# EAGLE board RTC-Module-Panel-v13 (EAGLE 5.06), part 1 of 2
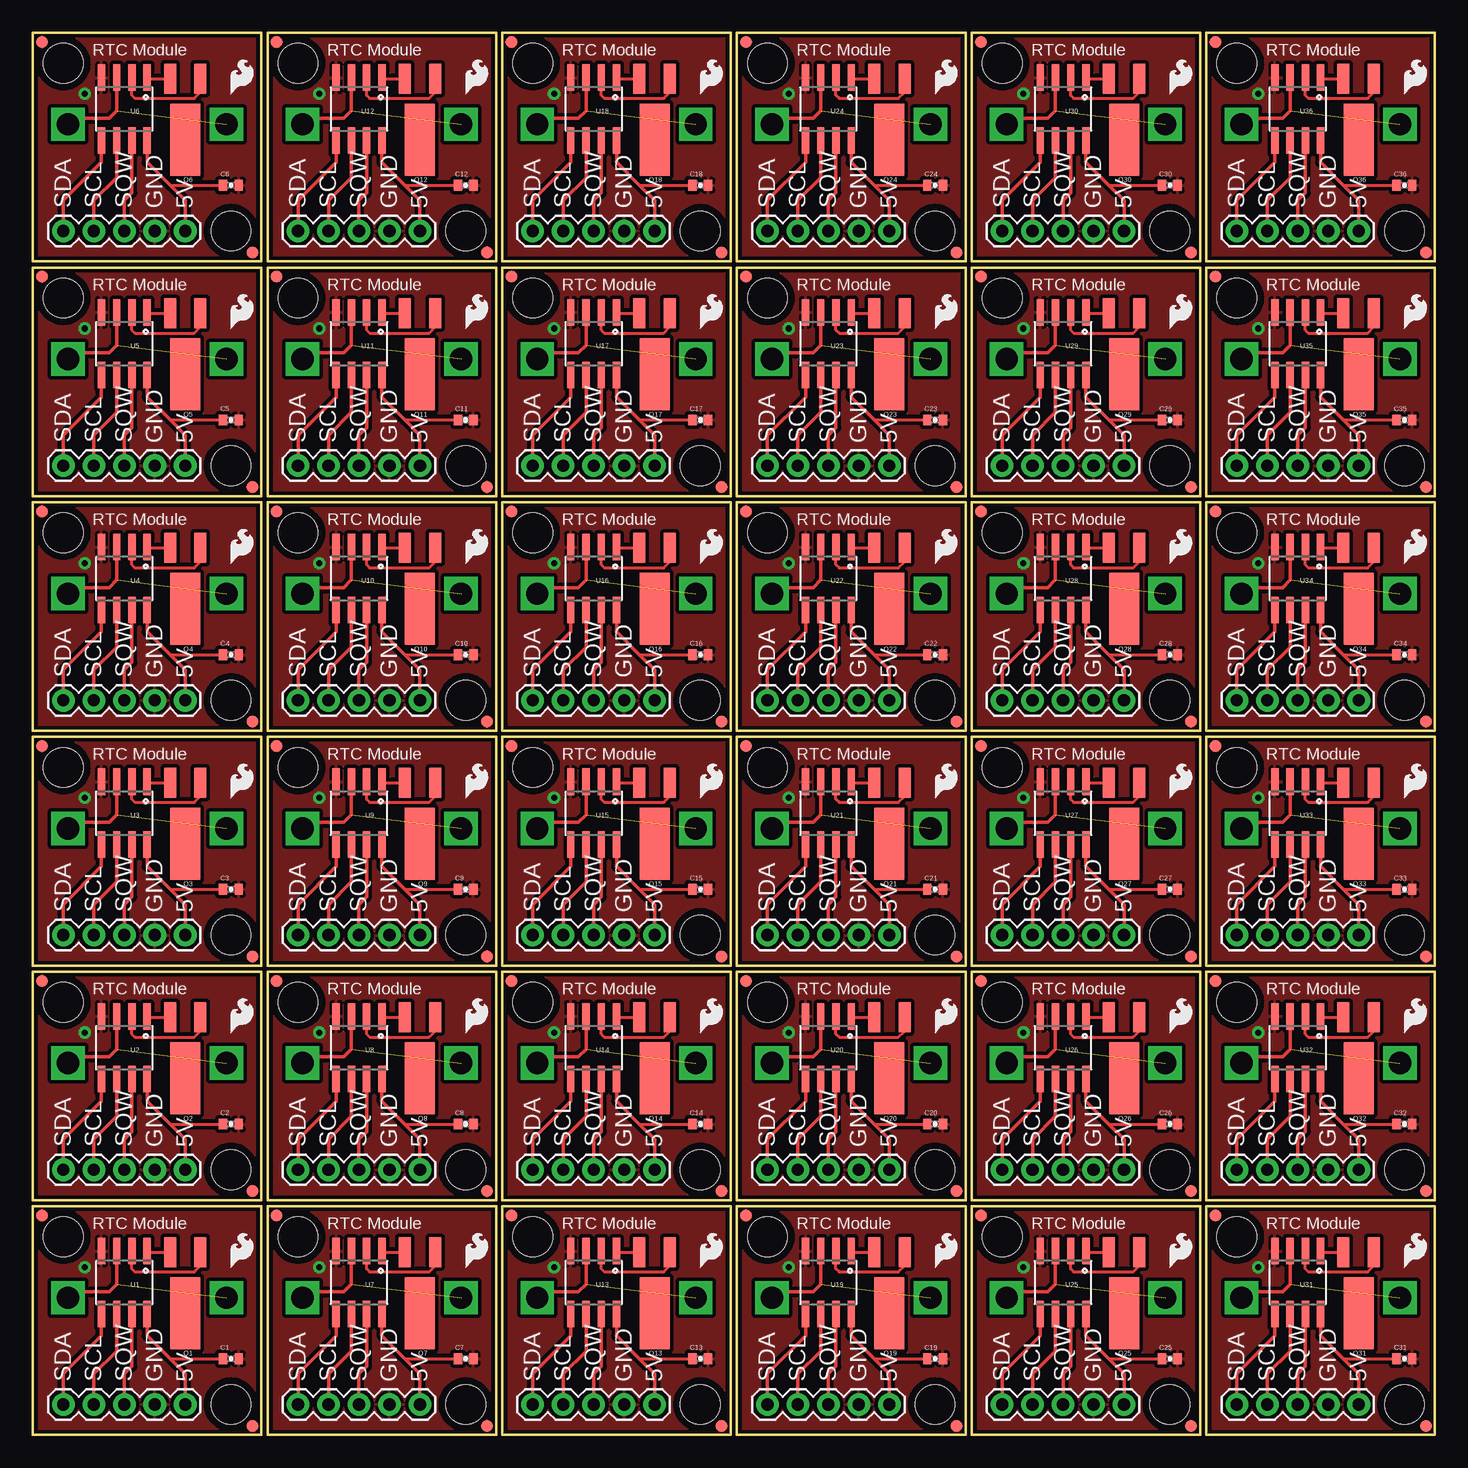
[diagram p0: board, top side]
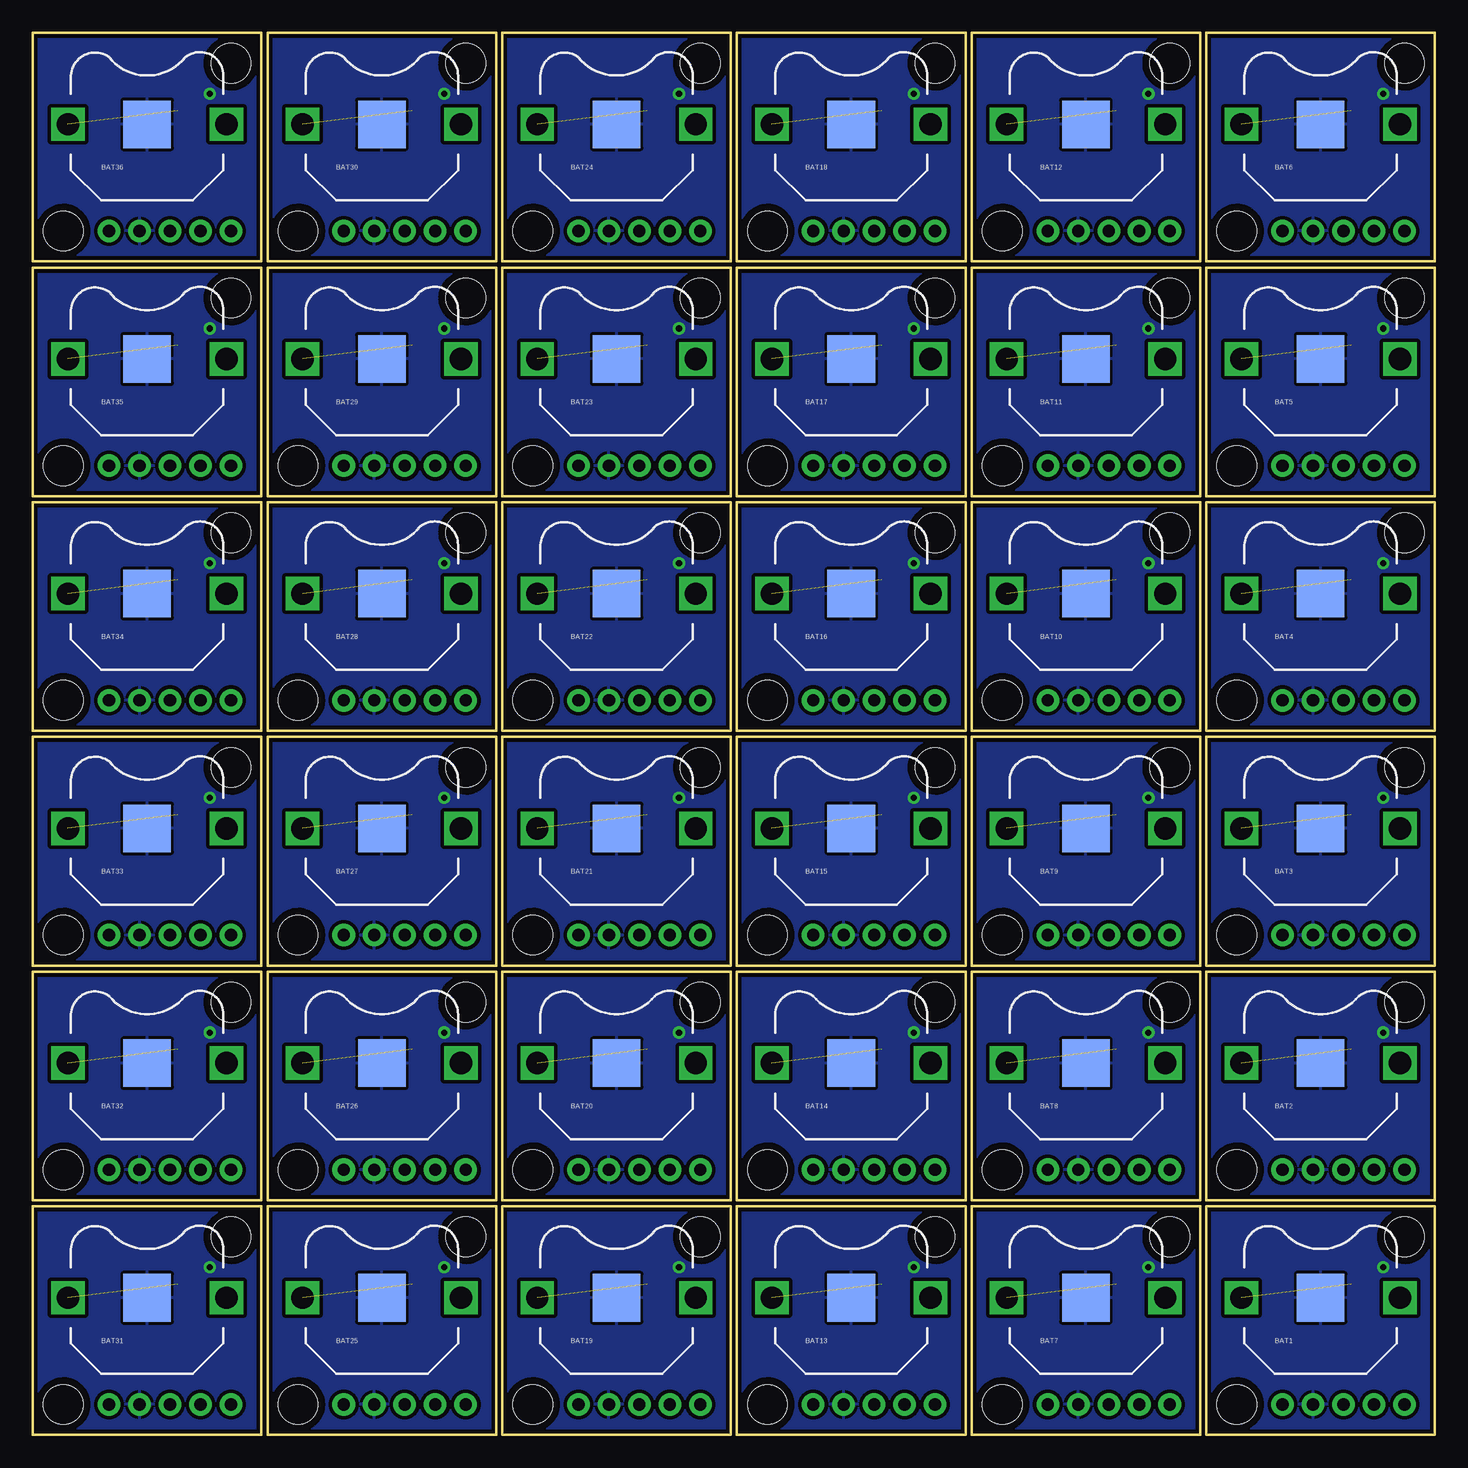
[diagram p1: board, bottom side, seen from below]

Size 116.84 x 116.84 mm. Coordinates in mm from the lower left corner, seen from the top.
Outline: 0,0 19.05,0 19.05,19.05 0,19.05 0,0
Outline: 0,19.56 19.05,19.56 19.05,38.61 0,38.61 0,19.56
Outline: 0,39.12 19.05,39.12 19.05,58.17 0,58.17 0,39.12
Outline: 0,58.67 19.05,58.67 19.05,77.72 0,77.72 0,58.67
Outline: 0,78.23 19.05,78.23 19.05,97.28 0,97.28 0,78.23
Outline: 0,97.79 19.05,97.79 19.05,116.84 0,116.84 0,97.79
Outline: 19.56,0 38.61,0 38.61,19.05 19.56,19.05 19.56,0
Outline: 19.56,19.56 38.61,19.56 38.61,38.61 19.56,38.61 19.56,19.56
Outline: 19.56,39.12 38.61,39.12 38.61,58.17 19.56,58.17 19.56,39.12
Outline: 19.56,58.67 38.61,58.67 38.61,77.72 19.56,77.72 19.56,58.67
Outline: 19.56,78.23 38.61,78.23 38.61,97.28 19.56,97.28 19.56,78.23
Outline: 19.56,97.79 38.61,97.79 38.61,116.84 19.56,116.84 19.56,97.79
Outline: 39.12,0 58.17,0 58.17,19.05 39.12,19.05 39.12,0
Outline: 39.12,19.56 58.17,19.56 58.17,38.61 39.12,38.61 39.12,19.56
Outline: 39.12,39.12 58.17,39.12 58.17,58.17 39.12,58.17 39.12,39.12
Outline: 39.12,58.67 58.17,58.67 58.17,77.72 39.12,77.72 39.12,58.67
Outline: 39.12,78.23 58.17,78.23 58.17,97.28 39.12,97.28 39.12,78.23
Outline: 39.12,97.79 58.17,97.79 58.17,116.84 39.12,116.84 39.12,97.79
Outline: 58.67,0 77.72,0 77.72,19.05 58.67,19.05 58.67,0
Outline: 58.67,19.56 77.72,19.56 77.72,38.61 58.67,38.61 58.67,19.56
Outline: 58.67,39.12 77.72,39.12 77.72,58.17 58.67,58.17 58.67,39.12
Outline: 58.67,58.67 77.72,58.67 77.72,77.72 58.67,77.72 58.67,58.67
Outline: 58.67,78.23 77.72,78.23 77.72,97.28 58.67,97.28 58.67,78.23
Outline: 58.67,97.79 77.72,97.79 77.72,116.84 58.67,116.84 58.67,97.79
Outline: 78.23,0 97.28,0 97.28,19.05 78.23,19.05 78.23,0
Outline: 78.23,19.56 97.28,19.56 97.28,38.61 78.23,38.61 78.23,19.56
Outline: 78.23,39.12 97.28,39.12 97.28,58.17 78.23,58.17 78.23,39.12
Outline: 78.23,58.67 97.28,58.67 97.28,77.72 78.23,77.72 78.23,58.67
Outline: 78.23,78.23 97.28,78.23 97.28,97.28 78.23,97.28 78.23,78.23
Outline: 78.23,97.79 97.28,97.79 97.28,116.84 78.23,116.84 78.23,97.79
Outline: 97.79,0 116.84,0 116.84,19.05 97.79,19.05 97.79,0
Outline: 97.79,19.56 116.84,19.56 116.84,38.61 97.79,38.61 97.79,19.56
Outline: 97.79,39.12 116.84,39.12 116.84,58.17 97.79,58.17 97.79,39.12
Outline: 97.79,58.67 116.84,58.67 116.84,77.72 97.79,77.72 97.79,58.67
Outline: 97.79,78.23 116.84,78.23 116.84,97.28 97.79,97.28 97.79,78.23
Outline: 97.79,97.79 116.84,97.79 116.84,116.84 97.79,116.84 97.79,97.79
Copper layers (1*16): Top 0.035mm / dielectric 1.5mm / Bottom 0.035mm
Design rules "SparkFun": minimum track width 8mil, minimum drill 20mil, track to track 8mil, track to pad 8mil, pad to pad 8mil, via to via 8mil, smd to smd 8mil, copper to edge 10mil, drill to drill 8mil, minimum pad ring 12mil, minimum via ring 10mil, stop-mask expansion 4mil, vias tented up to drill 20mil, thermal gap 10mil

## Footprints (pad centres in the part's own frame; a part is rotated, then mirrored left to right if it is on the bottom)
BATTCON_12MM_PTH = smd 3.962 x 3.962: GND 0,0 | drill 1.854 square: VCC@1 -6.604,0; VCC@2 6.604,0
0402-CAP = smd 0.7 x 0.9: 1 -0.65,0; 2 0.65,0
FIDUCIAL-1X2 = smd 1 x 1: 1 0,0
1X05 = drill 1.016 pad 1.88 round: 1 0,0; 2 2.54,0; 3 5.08,0; 4 7.62,0; 5 10.16,0
CRYSTAL-32KHZ-SMD = smd 2.5 x 6: SHEILD 0,5.08 | smd 1 x 2.5: X1 -1.27,0; X2 1.27,0
SO08 = smd 0.61 x 2.21: 1 -1.905,-2.616; 2 -0.635,-2.616; 3 0.635,-2.616; 4 1.905,-2.616; 5 1.905,2.616; 6 0.635,2.616; 7 -0.635,2.616; 8 -1.905,2.616
STAND-OFF = hole 3.302: 0,0

## Placement (x,y rotation side)
BAT1  [BATTCON_12MM_PTH]  9.53,11.43 0 bottom
BAT2  [BATTCON_12MM_PTH]  9.53,30.99 0 bottom
BAT3  [BATTCON_12MM_PTH]  9.53,50.55 0 bottom
BAT4  [BATTCON_12MM_PTH]  9.53,70.1 0 bottom
BAT5  [BATTCON_12MM_PTH]  9.53,89.66 0 bottom
BAT6  [BATTCON_12MM_PTH]  9.53,109.22 0 bottom
BAT7  [BATTCON_12MM_PTH]  29.08,11.43 0 bottom
BAT8  [BATTCON_12MM_PTH]  29.08,30.99 0 bottom
BAT9  [BATTCON_12MM_PTH]  29.08,50.55 0 bottom
BAT10  [BATTCON_12MM_PTH]  29.08,70.1 0 bottom
BAT11  [BATTCON_12MM_PTH]  29.08,89.66 0 bottom
BAT12  [BATTCON_12MM_PTH]  29.08,109.22 0 bottom
BAT13  [BATTCON_12MM_PTH]  48.64,11.43 0 bottom
BAT14  [BATTCON_12MM_PTH]  48.64,30.99 0 bottom
BAT15  [BATTCON_12MM_PTH]  48.64,50.55 0 bottom
BAT16  [BATTCON_12MM_PTH]  48.64,70.1 0 bottom
BAT17  [BATTCON_12MM_PTH]  48.64,89.66 0 bottom
BAT18  [BATTCON_12MM_PTH]  48.64,109.22 0 bottom
BAT19  [BATTCON_12MM_PTH]  68.2,11.43 0 bottom
BAT20  [BATTCON_12MM_PTH]  68.2,30.99 0 bottom
BAT21  [BATTCON_12MM_PTH]  68.2,50.55 0 bottom
BAT22  [BATTCON_12MM_PTH]  68.2,70.1 0 bottom
BAT23  [BATTCON_12MM_PTH]  68.2,89.66 0 bottom
BAT24  [BATTCON_12MM_PTH]  68.2,109.22 0 bottom
BAT25  [BATTCON_12MM_PTH]  87.76,11.43 0 bottom
BAT26  [BATTCON_12MM_PTH]  87.76,30.99 0 bottom
BAT27  [BATTCON_12MM_PTH]  87.76,50.55 0 bottom
BAT28  [BATTCON_12MM_PTH]  87.76,70.1 0 bottom
BAT29  [BATTCON_12MM_PTH]  87.76,89.66 0 bottom
BAT30  [BATTCON_12MM_PTH]  87.76,109.22 0 bottom
BAT31  [BATTCON_12MM_PTH]  107.31,11.43 0 bottom
BAT32  [BATTCON_12MM_PTH]  107.31,30.99 0 bottom
BAT33  [BATTCON_12MM_PTH]  107.31,50.55 0 bottom
BAT34  [BATTCON_12MM_PTH]  107.31,70.1 0 bottom
BAT35  [BATTCON_12MM_PTH]  107.31,89.66 0 bottom
BAT36  [BATTCON_12MM_PTH]  107.31,109.22 0 bottom
C1  [0402-CAP]  16.51,6.35 0 top
C2  [0402-CAP]  16.51,25.91 0 top
C3  [0402-CAP]  16.51,45.47 0 top
C4  [0402-CAP]  16.51,65.02 0 top
C5  [0402-CAP]  16.51,84.58 0 top
C6  [0402-CAP]  16.51,104.14 0 top
C7  [0402-CAP]  36.07,6.35 0 top
C8  [0402-CAP]  36.07,25.91 0 top
C9  [0402-CAP]  36.07,45.47 0 top
C10  [0402-CAP]  36.07,65.02 0 top
C11  [0402-CAP]  36.07,84.58 0 top
C12  [0402-CAP]  36.07,104.14 0 top
C13  [0402-CAP]  55.63,6.35 0 top
C14  [0402-CAP]  55.63,25.91 0 top
C15  [0402-CAP]  55.63,45.47 0 top
C16  [0402-CAP]  55.63,65.02 0 top
C17  [0402-CAP]  55.63,84.58 0 top
C18  [0402-CAP]  55.63,104.14 0 top
C19  [0402-CAP]  75.18,6.35 0 top
C20  [0402-CAP]  75.18,25.91 0 top
C21  [0402-CAP]  75.18,45.47 0 top
C22  [0402-CAP]  75.18,65.02 0 top
C23  [0402-CAP]  75.18,84.58 0 top
C24  [0402-CAP]  75.18,104.14 0 top
C25  [0402-CAP]  94.74,6.35 0 top
C26  [0402-CAP]  94.74,25.91 0 top
C27  [0402-CAP]  94.74,45.47 0 top
C28  [0402-CAP]  94.74,65.02 0 top
C29  [0402-CAP]  94.74,84.58 0 top
C30  [0402-CAP]  94.74,104.14 0 top
C31  [0402-CAP]  114.3,6.35 0 top
C32  [0402-CAP]  114.3,25.91 0 top
C33  [0402-CAP]  114.3,45.47 0 top
C34  [0402-CAP]  114.3,65.02 0 top
C35  [0402-CAP]  114.3,84.58 0 top
C36  [0402-CAP]  114.3,104.14 0 top
E$1  [FIDUCIAL-1X2]  0.76,18.29 0 top
E$2  [FIDUCIAL-1X2]  18.29,0.76 0 top
E$3  [FIDUCIAL-1X2]  0.76,37.85 0 top
E$4  [FIDUCIAL-1X2]  18.29,20.32 0 top
E$5  [FIDUCIAL-1X2]  0.76,57.4 0 top
E$6  [FIDUCIAL-1X2]  18.29,39.88 0 top
E$7  [FIDUCIAL-1X2]  0.76,76.96 0 top
E$8  [FIDUCIAL-1X2]  18.29,59.44 0 top
E$9  [FIDUCIAL-1X2]  0.76,96.52 0 top
E$10  [FIDUCIAL-1X2]  18.29,78.99 0 top
E$11  [FIDUCIAL-1X2]  0.76,116.08 0 top
E$12  [FIDUCIAL-1X2]  18.29,98.55 0 top
E$13  [FIDUCIAL-1X2]  20.32,18.29 0 top
E$14  [FIDUCIAL-1X2]  37.85,0.76 0 top
E$15  [FIDUCIAL-1X2]  20.32,37.85 0 top
E$16  [FIDUCIAL-1X2]  37.85,20.32 0 top
E$17  [FIDUCIAL-1X2]  20.32,57.4 0 top
E$18  [FIDUCIAL-1X2]  37.85,39.88 0 top
E$19  [FIDUCIAL-1X2]  20.32,76.96 0 top
E$20  [FIDUCIAL-1X2]  37.85,59.44 0 top
E$21  [FIDUCIAL-1X2]  20.32,96.52 0 top
E$22  [FIDUCIAL-1X2]  37.85,78.99 0 top
E$23  [FIDUCIAL-1X2]  20.32,116.08 0 top
E$24  [FIDUCIAL-1X2]  37.85,98.55 0 top
E$25  [FIDUCIAL-1X2]  39.88,18.29 0 top
E$26  [FIDUCIAL-1X2]  57.4,0.76 0 top
E$27  [FIDUCIAL-1X2]  39.88,37.85 0 top
E$28  [FIDUCIAL-1X2]  57.4,20.32 0 top
E$29  [FIDUCIAL-1X2]  39.88,57.4 0 top
E$30  [FIDUCIAL-1X2]  57.4,39.88 0 top
E$31  [FIDUCIAL-1X2]  39.88,76.96 0 top
E$32  [FIDUCIAL-1X2]  57.4,59.44 0 top
E$33  [FIDUCIAL-1X2]  39.88,96.52 0 top
E$34  [FIDUCIAL-1X2]  57.4,78.99 0 top
E$35  [FIDUCIAL-1X2]  39.88,116.08 0 top
E$36  [FIDUCIAL-1X2]  57.4,98.55 0 top
E$37  [FIDUCIAL-1X2]  59.44,18.29 0 top
E$38  [FIDUCIAL-1X2]  76.96,0.76 0 top
E$39  [FIDUCIAL-1X2]  59.44,37.85 0 top
E$40  [FIDUCIAL-1X2]  76.96,20.32 0 top
E$41  [FIDUCIAL-1X2]  59.44,57.4 0 top
E$42  [FIDUCIAL-1X2]  76.96,39.88 0 top
E$43  [FIDUCIAL-1X2]  59.44,76.96 0 top
E$44  [FIDUCIAL-1X2]  76.96,59.44 0 top
E$45  [FIDUCIAL-1X2]  59.44,96.52 0 top
E$46  [FIDUCIAL-1X2]  76.96,78.99 0 top
E$47  [FIDUCIAL-1X2]  59.44,116.08 0 top
E$48  [FIDUCIAL-1X2]  76.96,98.55 0 top
E$49  [FIDUCIAL-1X2]  78.99,18.29 0 top
E$50  [FIDUCIAL-1X2]  96.52,0.76 0 top
E$51  [FIDUCIAL-1X2]  78.99,37.85 0 top
E$52  [FIDUCIAL-1X2]  96.52,20.32 0 top
E$53  [FIDUCIAL-1X2]  78.99,57.4 0 top
E$54  [FIDUCIAL-1X2]  96.52,39.88 0 top
E$55  [FIDUCIAL-1X2]  78.99,76.96 0 top
E$56  [FIDUCIAL-1X2]  96.52,59.44 0 top
E$57  [FIDUCIAL-1X2]  78.99,96.52 0 top
E$58  [FIDUCIAL-1X2]  96.52,78.99 0 top
E$59  [FIDUCIAL-1X2]  78.99,116.08 0 top
E$60  [FIDUCIAL-1X2]  96.52,98.55 0 top
E$61  [FIDUCIAL-1X2]  98.55,18.29 0 top
E$62  [FIDUCIAL-1X2]  116.08,0.76 0 top
E$63  [FIDUCIAL-1X2]  98.55,37.85 0 top
E$64  [FIDUCIAL-1X2]  116.08,20.32 0 top
E$65  [FIDUCIAL-1X2]  98.55,57.4 0 top
E$66  [FIDUCIAL-1X2]  116.08,39.88 0 top
E$67  [FIDUCIAL-1X2]  98.55,76.96 0 top
E$68  [FIDUCIAL-1X2]  116.08,59.44 0 top
E$69  [FIDUCIAL-1X2]  98.55,96.52 0 top
E$70  [FIDUCIAL-1X2]  116.08,78.99 0 top
E$71  [FIDUCIAL-1X2]  98.55,116.08 0 top
E$72  [FIDUCIAL-1X2]  116.08,98.55 0 top
JP1  [1X05]  12.7,2.54 180 top
JP2  [1X05]  12.7,22.1 180 top
JP3  [1X05]  12.7,41.66 180 top
JP4  [1X05]  12.7,61.21 180 top
JP5  [1X05]  12.7,80.77 180 top
JP6  [1X05]  12.7,100.33 180 top
JP7  [1X05]  32.26,2.54 180 top
JP8  [1X05]  32.26,22.1 180 top
JP9  [1X05]  32.26,41.66 180 top
JP10  [1X05]  32.26,61.21 180 top
JP11  [1X05]  32.26,80.77 180 top
JP12  [1X05]  32.26,100.33 180 top
JP13  [1X05]  51.82,2.54 180 top
JP14  [1X05]  51.82,22.1 180 top
JP15  [1X05]  51.82,41.66 180 top
JP16  [1X05]  51.82,61.21 180 top
JP17  [1X05]  51.82,80.77 180 top
JP18  [1X05]  51.82,100.33 180 top
JP19  [1X05]  71.37,2.54 180 top
JP20  [1X05]  71.37,22.1 180 top
JP21  [1X05]  71.37,41.66 180 top
JP22  [1X05]  71.37,61.21 180 top
JP23  [1X05]  71.37,80.77 180 top
JP24  [1X05]  71.37,100.33 180 top
JP25  [1X05]  90.93,2.54 180 top
JP26  [1X05]  90.93,22.1 180 top
JP27  [1X05]  90.93,41.66 180 top
JP28  [1X05]  90.93,61.21 180 top
JP29  [1X05]  90.93,80.77 180 top
JP30  [1X05]  90.93,100.33 180 top
JP31  [1X05]  110.49,2.54 180 top
JP32  [1X05]  110.49,22.1 180 top
JP33  [1X05]  110.49,41.66 180 top
JP34  [1X05]  110.49,61.21 180 top
JP35  [1X05]  110.49,80.77 180 top
JP36  [1X05]  110.49,100.33 180 top
Q1  32.768kHz  [CRYSTAL-32KHZ-SMD]  12.7,15.24 180 top
Q2  32.768kHz  [CRYSTAL-32KHZ-SMD]  12.7,34.8 180 top
Q3  32.768kHz  [CRYSTAL-32KHZ-SMD]  12.7,54.36 180 top
Q4  32.768kHz  [CRYSTAL-32KHZ-SMD]  12.7,73.91 180 top
Q5  32.768kHz  [CRYSTAL-32KHZ-SMD]  12.7,93.47 180 top
Q6  32.768kHz  [CRYSTAL-32KHZ-SMD]  12.7,113.03 180 top
Q7  32.768kHz  [CRYSTAL-32KHZ-SMD]  32.26,15.24 180 top
Q8  32.768kHz  [CRYSTAL-32KHZ-SMD]  32.26,34.8 180 top
Q9  32.768kHz  [CRYSTAL-32KHZ-SMD]  32.26,54.36 180 top
Q10  32.768kHz  [CRYSTAL-32KHZ-SMD]  32.26,73.91 180 top
Q11  32.768kHz  [CRYSTAL-32KHZ-SMD]  32.26,93.47 180 top
Q12  32.768kHz  [CRYSTAL-32KHZ-SMD]  32.26,113.03 180 top
Q13  32.768kHz  [CRYSTAL-32KHZ-SMD]  51.82,15.24 180 top
Q14  32.768kHz  [CRYSTAL-32KHZ-SMD]  51.82,34.8 180 top
Q15  32.768kHz  [CRYSTAL-32KHZ-SMD]  51.82,54.36 180 top
Q16  32.768kHz  [CRYSTAL-32KHZ-SMD]  51.82,73.91 180 top
Q17  32.768kHz  [CRYSTAL-32KHZ-SMD]  51.82,93.47 180 top
Q18  32.768kHz  [CRYSTAL-32KHZ-SMD]  51.82,113.03 180 top
Q19  32.768kHz  [CRYSTAL-32KHZ-SMD]  71.37,15.24 180 top
Q20  32.768kHz  [CRYSTAL-32KHZ-SMD]  71.37,34.8 180 top
Q21  32.768kHz  [CRYSTAL-32KHZ-SMD]  71.37,54.36 180 top
Q22  32.768kHz  [CRYSTAL-32KHZ-SMD]  71.37,73.91 180 top
Q23  32.768kHz  [CRYSTAL-32KHZ-SMD]  71.37,93.47 180 top
Q24  32.768kHz  [CRYSTAL-32KHZ-SMD]  71.37,113.03 180 top
Q25  32.768kHz  [CRYSTAL-32KHZ-SMD]  90.93,15.24 180 top
Q26  32.768kHz  [CRYSTAL-32KHZ-SMD]  90.93,34.8 180 top
Q27  32.768kHz  [CRYSTAL-32KHZ-SMD]  90.93,54.36 180 top
Q28  32.768kHz  [CRYSTAL-32KHZ-SMD]  90.93,73.91 180 top
Q29  32.768kHz  [CRYSTAL-32KHZ-SMD]  90.93,93.47 180 top
Q30  32.768kHz  [CRYSTAL-32KHZ-SMD]  90.93,113.03 180 top
Q31  32.768kHz  [CRYSTAL-32KHZ-SMD]  110.49,15.24 180 top
Q32  32.768kHz  [CRYSTAL-32KHZ-SMD]  110.49,34.8 180 top
Q33  32.768kHz  [CRYSTAL-32KHZ-SMD]  110.49,54.36 180 top
Q34  32.768kHz  [CRYSTAL-32KHZ-SMD]  110.49,73.91 180 top
Q35  32.768kHz  [CRYSTAL-32KHZ-SMD]  110.49,93.47 180 top
Q36  32.768kHz  [CRYSTAL-32KHZ-SMD]  110.49,113.03 180 top
U1  DS1307  [SO08]  7.62,12.7 180 top
U2  DS1307  [SO08]  7.62,32.26 180 top
U3  DS1307  [SO08]  7.62,51.82 180 top
U4  DS1307  [SO08]  7.62,71.37 180 top
U5  DS1307  [SO08]  7.62,90.93 180 top
U6  DS1307  [SO08]  7.62,110.49 180 top
U7  DS1307  [SO08]  27.18,12.7 180 top
U8  DS1307  [SO08]  27.18,32.26 180 top
U9  DS1307  [SO08]  27.18,51.82 180 top
U10  DS1307  [SO08]  27.18,71.37 180 top
U11  DS1307  [SO08]  27.18,90.93 180 top
U12  DS1307  [SO08]  27.18,110.49 180 top
U13  DS1307  [SO08]  46.74,12.7 180 top
U14  DS1307  [SO08]  46.74,32.26 180 top
U15  DS1307  [SO08]  46.74,51.82 180 top
U16  DS1307  [SO08]  46.74,71.37 180 top
U17  DS1307  [SO08]  46.74,90.93 180 top
U18  DS1307  [SO08]  46.74,110.49 180 top
U19  DS1307  [SO08]  66.29,12.7 180 top
U20  DS1307  [SO08]  66.29,32.26 180 top
U21  DS1307  [SO08]  66.29,51.82 180 top
U22  DS1307  [SO08]  66.29,71.37 180 top
U23  DS1307  [SO08]  66.29,90.93 180 top
U24  DS1307  [SO08]  66.29,110.49 180 top
U25  DS1307  [SO08]  85.85,12.7 180 top
U26  DS1307  [SO08]  85.85,32.26 180 top
U27  DS1307  [SO08]  85.85,51.82 180 top
U28  DS1307  [SO08]  85.85,71.37 180 top
U29  DS1307  [SO08]  85.85,90.93 180 top
U30  DS1307  [SO08]  85.85,110.49 180 top
U31  DS1307  [SO08]  105.41,12.7 180 top
U32  DS1307  [SO08]  105.41,32.26 180 top
U33  DS1307  [SO08]  105.41,51.82 180 top
U34  DS1307  [SO08]  105.41,71.37 180 top
U35  DS1307  [SO08]  105.41,90.93 180 top
U36  DS1307  [SO08]  105.41,110.49 180 top
U$1  LOGO-SFESK  [SFE-LOGO-FLAME]  16.51,13.97 0 top
U$2  LOGO-SFESK  [SFE-LOGO-FLAME]  16.51,33.53 0 top
U$3  STAND-OFF  [STAND-OFF]  16.51,22.1 0 top
U$4  STAND-OFF  [STAND-OFF]  2.54,36.07 0 top
U$5  LOGO-SFESK  [SFE-LOGO-FLAME]  16.51,53.09 0 top
U$6  STAND-OFF  [STAND-OFF]  16.51,2.54 0 top
U$7  STAND-OFF  [STAND-OFF]  2.54,16.51 0 top
U$8  STAND-OFF  [STAND-OFF]  16.51,41.66 0 top
U$9  STAND-OFF  [STAND-OFF]  2.54,55.63 0 top
U$10  LOGO-SFESK  [SFE-LOGO-FLAME]  16.51,72.64 0 top
U$11  STAND-OFF  [STAND-OFF]  16.51,61.21 0 top
U$12  STAND-OFF  [STAND-OFF]  2.54,75.18 0 top
U$13  LOGO-SFESK  [SFE-LOGO-FLAME]  16.51,92.2 0 top
U$14  STAND-OFF  [STAND-OFF]  16.51,80.77 0 top
U$15  STAND-OFF  [STAND-OFF]  2.54,94.74 0 top
U$16  LOGO-SFESK  [SFE-LOGO-FLAME]  16.51,111.76 0 top
U$17  STAND-OFF  [STAND-OFF]  16.51,100.33 0 top
U$18  STAND-OFF  [STAND-OFF]  2.54,114.3 0 top
U$19  LOGO-SFESK  [SFE-LOGO-FLAME]  36.07,13.97 0 top
U$20  STAND-OFF  [STAND-OFF]  36.07,2.54 0 top
U$21  STAND-OFF  [STAND-OFF]  22.1,16.51 0 top
U$22  LOGO-SFESK  [SFE-LOGO-FLAME]  36.07,33.53 0 top
U$23  STAND-OFF  [STAND-OFF]  36.07,22.1 0 top
U$24  STAND-OFF  [STAND-OFF]  22.1,36.07 0 top
U$25  LOGO-SFESK  [SFE-LOGO-FLAME]  36.07,53.09 0 top
U$26  STAND-OFF  [STAND-OFF]  36.07,41.66 0 top
U$27  STAND-OFF  [STAND-OFF]  22.1,55.63 0 top
U$28  LOGO-SFESK  [SFE-LOGO-FLAME]  36.07,72.64 0 top
U$29  STAND-OFF  [STAND-OFF]  36.07,61.21 0 top
U$30  STAND-OFF  [STAND-OFF]  22.1,75.18 0 top
U$31  LOGO-SFESK  [SFE-LOGO-FLAME]  36.07,92.2 0 top
U$32  STAND-OFF  [STAND-OFF]  36.07,80.77 0 top
U$33  STAND-OFF  [STAND-OFF]  22.1,94.74 0 top
U$34  LOGO-SFESK  [SFE-LOGO-FLAME]  36.07,111.76 0 top
U$35  STAND-OFF  [STAND-OFF]  36.07,100.33 0 top
U$36  STAND-OFF  [STAND-OFF]  22.1,114.3 0 top
U$37  LOGO-SFESK  [SFE-LOGO-FLAME]  55.63,13.97 0 top
U$38  STAND-OFF  [STAND-OFF]  55.63,2.54 0 top
U$39  STAND-OFF  [STAND-OFF]  41.66,16.51 0 top
U$40  LOGO-SFESK  [SFE-LOGO-FLAME]  55.63,33.53 0 top
U$41  STAND-OFF  [STAND-OFF]  55.63,22.1 0 top
U$42  STAND-OFF  [STAND-OFF]  41.66,36.07 0 top
U$43  LOGO-SFESK  [SFE-LOGO-FLAME]  55.63,53.09 0 top
U$44  STAND-OFF  [STAND-OFF]  55.63,41.66 0 top
U$45  STAND-OFF  [STAND-OFF]  41.66,55.63 0 top
U$46  LOGO-SFESK  [SFE-LOGO-FLAME]  55.63,72.64 0 top
U$47  STAND-OFF  [STAND-OFF]  55.63,61.21 0 top
U$48  STAND-OFF  [STAND-OFF]  41.66,75.18 0 top
U$49  LOGO-SFESK  [SFE-LOGO-FLAME]  55.63,92.2 0 top
U$50  STAND-OFF  [STAND-OFF]  55.63,80.77 0 top
U$51  STAND-OFF  [STAND-OFF]  41.66,94.74 0 top
U$52  LOGO-SFESK  [SFE-LOGO-FLAME]  55.63,111.76 0 top
U$53  STAND-OFF  [STAND-OFF]  55.63,100.33 0 top
U$54  STAND-OFF  [STAND-OFF]  41.66,114.3 0 top
U$55  LOGO-SFESK  [SFE-LOGO-FLAME]  75.18,13.97 0 top
U$56  STAND-OFF  [STAND-OFF]  75.18,2.54 0 top
U$57  STAND-OFF  [STAND-OFF]  61.21,16.51 0 top
U$58  LOGO-SFESK  [SFE-LOGO-FLAME]  75.18,33.53 0 top
U$59  STAND-OFF  [STAND-OFF]  75.18,22.1 0 top
U$60  STAND-OFF  [STAND-OFF]  61.21,36.07 0 top
U$61  LOGO-SFESK  [SFE-LOGO-FLAME]  75.18,53.09 0 top
U$62  STAND-OFF  [STAND-OFF]  75.18,41.66 0 top
U$63  STAND-OFF  [STAND-OFF]  61.21,55.63 0 top
U$64  LOGO-SFESK  [SFE-LOGO-FLAME]  75.18,72.64 0 top
U$65  STAND-OFF  [STAND-OFF]  75.18,61.21 0 top
U$66  STAND-OFF  [STAND-OFF]  61.21,75.18 0 top
U$67  LOGO-SFESK  [SFE-LOGO-FLAME]  75.18,92.2 0 top
U$68  STAND-OFF  [STAND-OFF]  75.18,80.77 0 top
U$69  STAND-OFF  [STAND-OFF]  61.21,94.74 0 top
U$70  LOGO-SFESK  [SFE-LOGO-FLAME]  75.18,111.76 0 top
U$71  STAND-OFF  [STAND-OFF]  75.18,100.33 0 top
U$72  STAND-OFF  [STAND-OFF]  61.21,114.3 0 top
U$73  LOGO-SFESK  [SFE-LOGO-FLAME]  94.74,13.97 0 top
U$74  STAND-OFF  [STAND-OFF]  94.74,2.54 0 top
U$75  STAND-OFF  [STAND-OFF]  80.77,16.51 0 top
U$76  LOGO-SFESK  [SFE-LOGO-FLAME]  94.74,33.53 0 top
U$77  STAND-OFF  [STAND-OFF]  94.74,22.1 0 top
U$78  STAND-OFF  [STAND-OFF]  80.77,36.07 0 top
U$79  LOGO-SFESK  [SFE-LOGO-FLAME]  94.74,53.09 0 top
U$80  STAND-OFF  [STAND-OFF]  94.74,41.66 0 top
U$81  STAND-OFF  [STAND-OFF]  80.77,55.63 0 top
U$82  LOGO-SFESK  [SFE-LOGO-FLAME]  94.74,72.64 0 top
U$83  STAND-OFF  [STAND-OFF]  94.74,61.21 0 top
U$84  STAND-OFF  [STAND-OFF]  80.77,75.18 0 top
U$85  LOGO-SFESK  [SFE-LOGO-FLAME]  94.74,92.2 0 top
U$86  STAND-OFF  [STAND-OFF]  94.74,80.77 0 top
U$87  STAND-OFF  [STAND-OFF]  80.77,94.74 0 top
U$88  LOGO-SFESK  [SFE-LOGO-FLAME]  94.74,111.76 0 top
U$89  STAND-OFF  [STAND-OFF]  94.74,100.33 0 top
U$90  STAND-OFF  [STAND-OFF]  80.77,114.3 0 top
U$91  LOGO-SFESK  [SFE-LOGO-FLAME]  114.3,13.97 0 top
U$92  STAND-OFF  [STAND-OFF]  114.3,2.54 0 top
U$93  STAND-OFF  [STAND-OFF]  100.33,16.51 0 top
U$94  LOGO-SFESK  [SFE-LOGO-FLAME]  114.3,33.53 0 top
U$95  STAND-OFF  [STAND-OFF]  114.3,22.1 0 top
U$96  STAND-OFF  [STAND-OFF]  100.33,36.07 0 top
U$97  LOGO-SFESK  [SFE-LOGO-FLAME]  114.3,53.09 0 top
U$98  STAND-OFF  [STAND-OFF]  114.3,41.66 0 top
U$99  STAND-OFF  [STAND-OFF]  100.33,55.63 0 top
U$100  LOGO-SFESK  [SFE-LOGO-FLAME]  114.3,72.64 0 top
U$101  STAND-OFF  [STAND-OFF]  114.3,61.21 0 top
U$102  STAND-OFF  [STAND-OFF]  100.33,75.18 0 top
U$103  LOGO-SFESK  [SFE-LOGO-FLAME]  114.3,92.2 0 top
U$104  STAND-OFF  [STAND-OFF]  114.3,80.77 0 top
U$105  STAND-OFF  [STAND-OFF]  100.33,94.74 0 top
U$106  LOGO-SFESK  [SFE-LOGO-FLAME]  114.3,111.76 0 top
U$107  STAND-OFF  [STAND-OFF]  114.3,100.33 0 top
U$108  STAND-OFF  [STAND-OFF]  100.33,114.3 0 top

## Library data of the parts
BAT1-BAT36 C1-C36 E$1-E$72 JP1-JP36 Q1-Q36 U1-U36 U$1-U$108 = SparkFun

## Nets
GND: BAT1.GND C1.2 JP1.2 U1.4
GND1: BAT2.GND C2.2 JP2.2 U2.4
GND2: BAT3.GND C3.2 JP3.2 U3.4
GND3: BAT4.GND C4.2 JP4.2 U4.4
GND4: BAT5.GND C5.2 JP5.2 U5.4
GND5: BAT6.GND C6.2 JP6.2 U6.4
GND6: BAT7.GND C7.2 JP7.2 U7.4
GND7: BAT8.GND C8.2 JP8.2 U8.4
GND8: BAT9.GND C9.2 JP9.2 U9.4
GND9: BAT10.GND C10.2 JP10.2 U10.4
GND10: BAT11.GND C11.2 JP11.2 U11.4
GND11: BAT12.GND C12.2 JP12.2 U12.4
GND12: BAT13.GND C13.2 JP13.2 U13.4
GND13: BAT14.GND C14.2 JP14.2 U14.4
GND14: BAT15.GND C15.2 JP15.2 U15.4
GND15: BAT16.GND C16.2 JP16.2 U16.4
GND16: BAT17.GND C17.2 JP17.2 U17.4
GND17: BAT18.GND C18.2 JP18.2 U18.4
GND18: BAT19.GND C19.2 JP19.2 U19.4
GND19: BAT20.GND C20.2 JP20.2 U20.4
GND20: BAT21.GND C21.2 JP21.2 U21.4
GND21: BAT22.GND C22.2 JP22.2 U22.4
GND22: BAT23.GND C23.2 JP23.2 U23.4
GND23: BAT24.GND C24.2 JP24.2 U24.4
GND24: BAT25.GND C25.2 JP25.2 U25.4
GND25: BAT26.GND C26.2 JP26.2 U26.4
GND26: BAT27.GND C27.2 JP27.2 U27.4
GND27: BAT28.GND C28.2 JP28.2 U28.4
GND28: BAT29.GND C29.2 JP29.2 U29.4
GND29: BAT30.GND C30.2 JP30.2 U30.4
GND30: BAT31.GND C31.2 JP31.2 U31.4
GND31: BAT32.GND C32.2 JP32.2 U32.4
GND32: BAT33.GND C33.2 JP33.2 U33.4
GND33: BAT34.GND C34.2 JP34.2 U34.4
GND34: BAT35.GND C35.2 JP35.2 U35.4
GND35: BAT36.GND C36.2 JP36.2 U36.4
N$1: Q1.X2 U1.1
N$2: Q1.X1 U1.2
N$3: Q2.X2 U2.1
N$4: BAT1.VCC@1 U1.3
N$5: Q2.X1 U2.2
N$6: BAT2.VCC@1 U2.3
N$7: Q3.X2 U3.1
N$8: Q3.X1 U3.2
N$9: BAT3.VCC@1 U3.3
N$10: Q4.X2 U4.1
N$11: Q4.X1 U4.2
N$12: BAT4.VCC@1 U4.3
N$13: Q5.X2 U5.1
N$14: Q5.X1 U5.2
N$15: BAT5.VCC@1 U5.3
N$16: Q6.X2 U6.1
N$17: Q6.X1 U6.2
N$18: BAT6.VCC@1 U6.3
N$19: Q7.X2 U7.1
N$20: Q7.X1 U7.2
N$21: BAT7.VCC@1 U7.3
N$22: Q8.X2 U8.1
N$23: Q8.X1 U8.2
N$24: BAT8.VCC@1 U8.3
N$25: Q9.X2 U9.1
N$26: Q9.X1 U9.2
N$27: BAT9.VCC@1 U9.3
N$28: Q10.X2 U10.1
N$29: Q10.X1 U10.2
N$30: BAT10.VCC@1 U10.3
N$31: Q11.X2 U11.1
N$32: Q11.X1 U11.2
N$33: BAT11.VCC@1 U11.3
N$34: Q12.X2 U12.1
N$35: Q12.X1 U12.2
N$36: BAT12.VCC@1 U12.3
N$37: Q13.X2 U13.1
N$38: Q13.X1 U13.2
N$39: BAT13.VCC@1 U13.3
N$40: Q14.X2 U14.1
N$41: Q14.X1 U14.2
N$42: BAT14.VCC@1 U14.3
N$43: Q15.X2 U15.1
N$44: Q15.X1 U15.2
N$45: BAT15.VCC@1 U15.3
N$46: Q16.X2 U16.1
N$47: Q16.X1 U16.2
N$48: BAT16.VCC@1 U16.3
N$49: Q17.X2 U17.1
N$50: Q17.X1 U17.2
N$51: BAT17.VCC@1 U17.3
N$52: Q18.X2 U18.1
N$53: Q18.X1 U18.2
N$54: BAT18.VCC@1 U18.3
N$55: Q19.X2 U19.1
N$56: Q19.X1 U19.2
N$57: BAT19.VCC@1 U19.3
N$58: Q20.X2 U20.1
N$59: Q20.X1 U20.2
N$60: BAT20.VCC@1 U20.3
N$61: Q21.X2 U21.1
N$62: Q21.X1 U21.2
N$63: BAT21.VCC@1 U21.3
N$64: Q22.X2 U22.1
N$65: Q22.X1 U22.2
N$66: BAT22.VCC@1 U22.3
N$67: Q23.X2 U23.1
N$68: Q23.X1 U23.2
N$69: BAT23.VCC@1 U23.3
N$70: Q24.X2 U24.1
N$71: Q24.X1 U24.2
N$72: BAT24.VCC@1 U24.3
N$73: Q25.X2 U25.1
N$74: Q25.X1 U25.2
N$75: BAT25.VCC@1 U25.3
N$76: Q26.X2 U26.1
N$77: Q26.X1 U26.2
N$78: BAT26.VCC@1 U26.3
N$79: Q27.X2 U27.1
N$80: Q27.X1 U27.2
N$81: BAT27.VCC@1 U27.3
N$82: Q28.X2 U28.1
N$83: Q28.X1 U28.2
N$84: BAT28.VCC@1 U28.3
N$85: Q29.X2 U29.1
N$86: Q29.X1 U29.2
N$87: BAT29.VCC@1 U29.3
N$88: Q30.X2 U30.1
N$89: Q30.X1 U30.2
N$90: BAT30.VCC@1 U30.3
N$91: Q31.X2 U31.1
N$92: Q31.X1 U31.2
N$93: BAT31.VCC@1 U31.3
N$94: Q32.X2 U32.1
N$95: Q32.X1 U32.2
N$96: BAT32.VCC@1 U32.3
N$97: Q33.X2 U33.1
N$98: Q33.X1 U33.2
N$99: BAT33.VCC@1 U33.3
N$100: Q34.X2 U34.1
N$101: Q34.X1 U34.2
N$102: BAT34.VCC@1 U34.3
N$103: Q35.X2 U35.1
N$104: Q35.X1 U35.2
N$105: BAT35.VCC@1 U35.3
N$106: Q36.X2 U36.1
N$107: Q36.X1 U36.2
N$108: BAT36.VCC@1 U36.3
SCL: JP1.4 U1.6
SCL1: JP2.4 U2.6
SCL2: JP3.4 U3.6
SCL3: JP4.4 U4.6
SCL4: JP5.4 U5.6
SCL5: JP6.4 U6.6
SCL6: JP7.4 U7.6
SCL7: JP8.4 U8.6
SCL8: JP9.4 U9.6
SCL9: JP10.4 U10.6
SCL10: JP11.4 U11.6
SCL11: JP12.4 U12.6
SCL12: JP13.4 U13.6
SCL13: JP14.4 U14.6
SCL14: JP15.4 U15.6
SCL15: JP16.4 U16.6
SCL16: JP17.4 U17.6
SCL17: JP18.4 U18.6
SCL18: JP19.4 U19.6
SCL19: JP20.4 U20.6
SCL20: JP21.4 U21.6
SCL21: JP22.4 U22.6
SCL22: JP23.4 U23.6
SCL23: JP24.4 U24.6
SCL24: JP25.4 U25.6
SCL25: JP26.4 U26.6
SCL26: JP27.4 U27.6
SCL27: JP28.4 U28.6
SCL28: JP29.4 U29.6
SCL29: JP30.4 U30.6
SCL30: JP31.4 U31.6
SCL31: JP32.4 U32.6
SCL32: JP33.4 U33.6
SCL33: JP34.4 U34.6
SCL34: JP35.4 U35.6
SCL35: JP36.4 U36.6
SDA: JP1.5 U1.5
SDA1: JP2.5 U2.5
SDA2: JP3.5 U3.5
SDA3: JP4.5 U4.5
SDA4: JP5.5 U5.5
SDA5: JP6.5 U6.5
SDA6: JP7.5 U7.5
SDA7: JP8.5 U8.5
SDA8: JP9.5 U9.5
SDA9: JP10.5 U10.5
SDA10: JP11.5 U11.5
SDA11: JP12.5 U12.5
SDA12: JP13.5 U13.5
SDA13: JP14.5 U14.5
SDA14: JP15.5 U15.5
SDA15: JP16.5 U16.5
SDA16: JP17.5 U17.5
SDA17: JP18.5 U18.5
SDA18: JP19.5 U19.5
SDA19: JP20.5 U20.5
SDA20: JP21.5 U21.5
SDA21: JP22.5 U22.5
SDA22: JP23.5 U23.5
SDA23: JP24.5 U24.5
SDA24: JP25.5 U25.5
SDA25: JP26.5 U26.5
SDA26: JP27.5 U27.5
SDA27: JP28.5 U28.5
SDA28: JP29.5 U29.5
SDA29: JP30.5 U30.5
SDA30: JP31.5 U31.5
SDA31: JP32.5 U32.5
SDA32: JP33.5 U33.5
SDA33: JP34.5 U34.5
SDA34: JP35.5 U35.5
SDA35: JP36.5 U36.5
SQW: JP1.3 U1.7
SQW1: JP2.3 U2.7
SQW2: JP3.3 U3.7
SQW3: JP4.3 U4.7
SQW4: JP5.3 U5.7
SQW5: JP6.3 U6.7
SQW6: JP7.3 U7.7
SQW7: JP8.3 U8.7
SQW8: JP9.3 U9.7
SQW9: JP10.3 U10.7
SQW10: JP11.3 U11.7
SQW11: JP12.3 U12.7
SQW12: JP13.3 U13.7
SQW13: JP14.3 U14.7
SQW14: JP15.3 U15.7
SQW15: JP16.3 U16.7
SQW16: JP17.3 U17.7
SQW17: JP18.3 U18.7
SQW18: JP19.3 U19.7
SQW19: JP20.3 U20.7
SQW20: JP21.3 U21.7
SQW21: JP22.3 U22.7
SQW22: JP23.3 U23.7
SQW23: JP24.3 U24.7
SQW24: JP25.3 U25.7
SQW25: JP26.3 U26.7
SQW26: JP27.3 U27.7
SQW27: JP28.3 U28.7
SQW28: JP29.3 U29.7
SQW29: JP30.3 U30.7
SQW30: JP31.3 U31.7
SQW31: JP32.3 U32.7
SQW32: JP33.3 U33.7
SQW33: JP34.3 U34.7
SQW34: JP35.3 U35.7
SQW35: JP36.3 U36.7
VCC: C1.1 JP1.1 U1.8
VCC1: C2.1 JP2.1 U2.8
VCC2: C3.1 JP3.1 U3.8
VCC3: C4.1 JP4.1 U4.8
VCC4: C5.1 JP5.1 U5.8
VCC5: C6.1 JP6.1 U6.8
VCC6: C7.1 JP7.1 U7.8
VCC7: C8.1 JP8.1 U8.8
VCC8: C9.1 JP9.1 U9.8
VCC9: C10.1 JP10.1 U10.8
VCC10: C11.1 JP11.1 U11.8
VCC11: C12.1 JP12.1 U12.8
VCC12: C13.1 JP13.1 U13.8
VCC13: C14.1 JP14.1 U14.8
VCC14: C15.1 JP15.1 U15.8
VCC15: C16.1 JP16.1 U16.8
VCC16: C17.1 JP17.1 U17.8
VCC17: C18.1 JP18.1 U18.8
VCC18: C19.1 JP19.1 U19.8
VCC19: C20.1 JP20.1 U20.8
VCC20: C21.1 JP21.1 U21.8
VCC21: C22.1 JP22.1 U22.8
VCC22: C23.1 JP23.1 U23.8
VCC23: C24.1 JP24.1 U24.8
VCC24: C25.1 JP25.1 U25.8
VCC25: C26.1 JP26.1 U26.8
VCC26: C27.1 JP27.1 U27.8
VCC27: C28.1 JP28.1 U28.8
VCC28: C29.1 JP29.1 U29.8
VCC29: C30.1 JP30.1 U30.8
VCC30: C31.1 JP31.1 U31.8
VCC31: C32.1 JP32.1 U32.8
VCC32: C33.1 JP33.1 U33.8
VCC33: C34.1 JP34.1 U34.8
VCC34: C35.1 JP35.1 U35.8
VCC35: C36.1 JP36.1 U36.8